# Altium PCB АСТА.758723.035_V3.PcbDoc
Units mm, origin at the board's own origin, x right, y up, seen from the top; angles counter-clockwise.
Board outline 100 x 38 mm, 2 copper layers (Top Layer, Bottom Layer); 18 components, 10 nets, 84 pads, 15 vias.
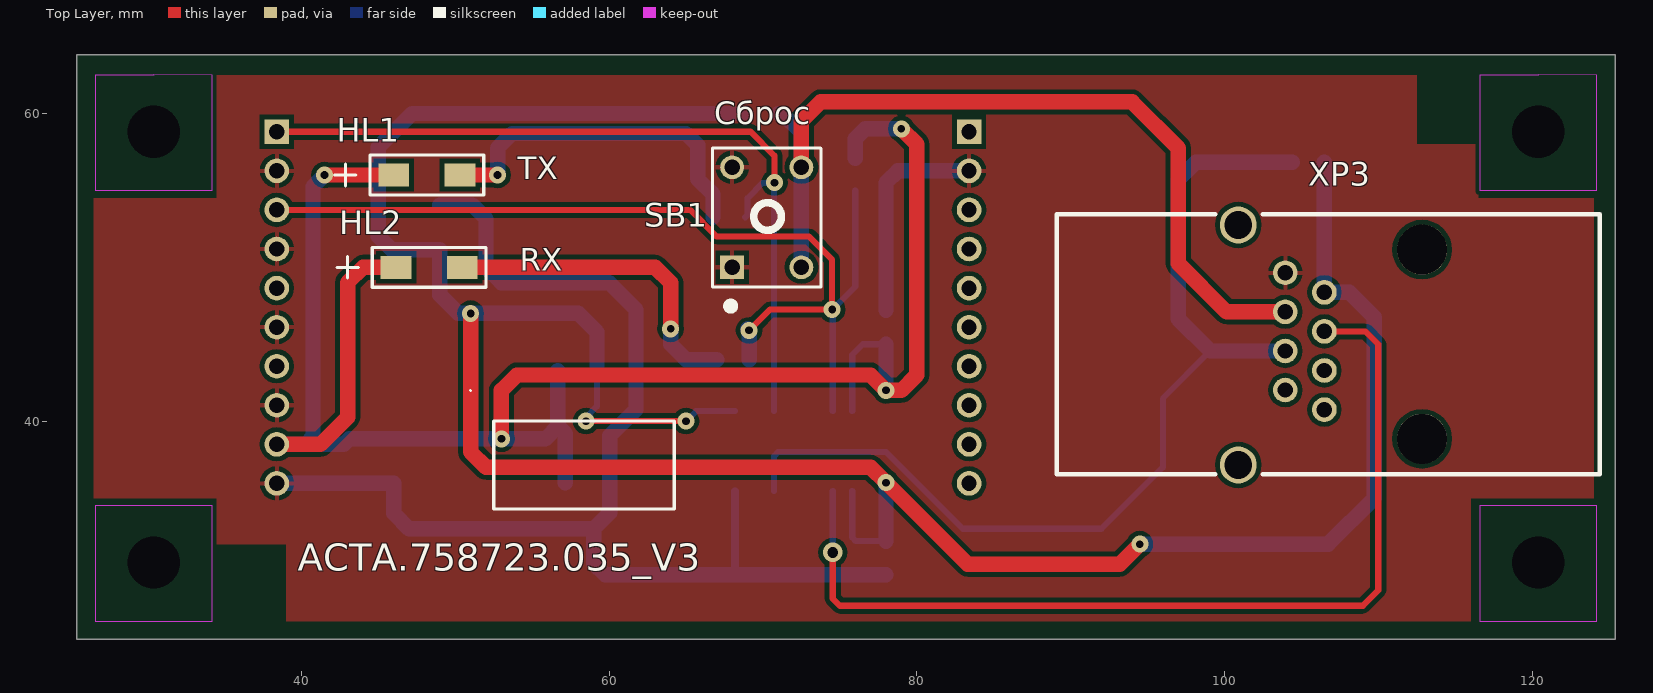
[diagram p0: Top Layer view]
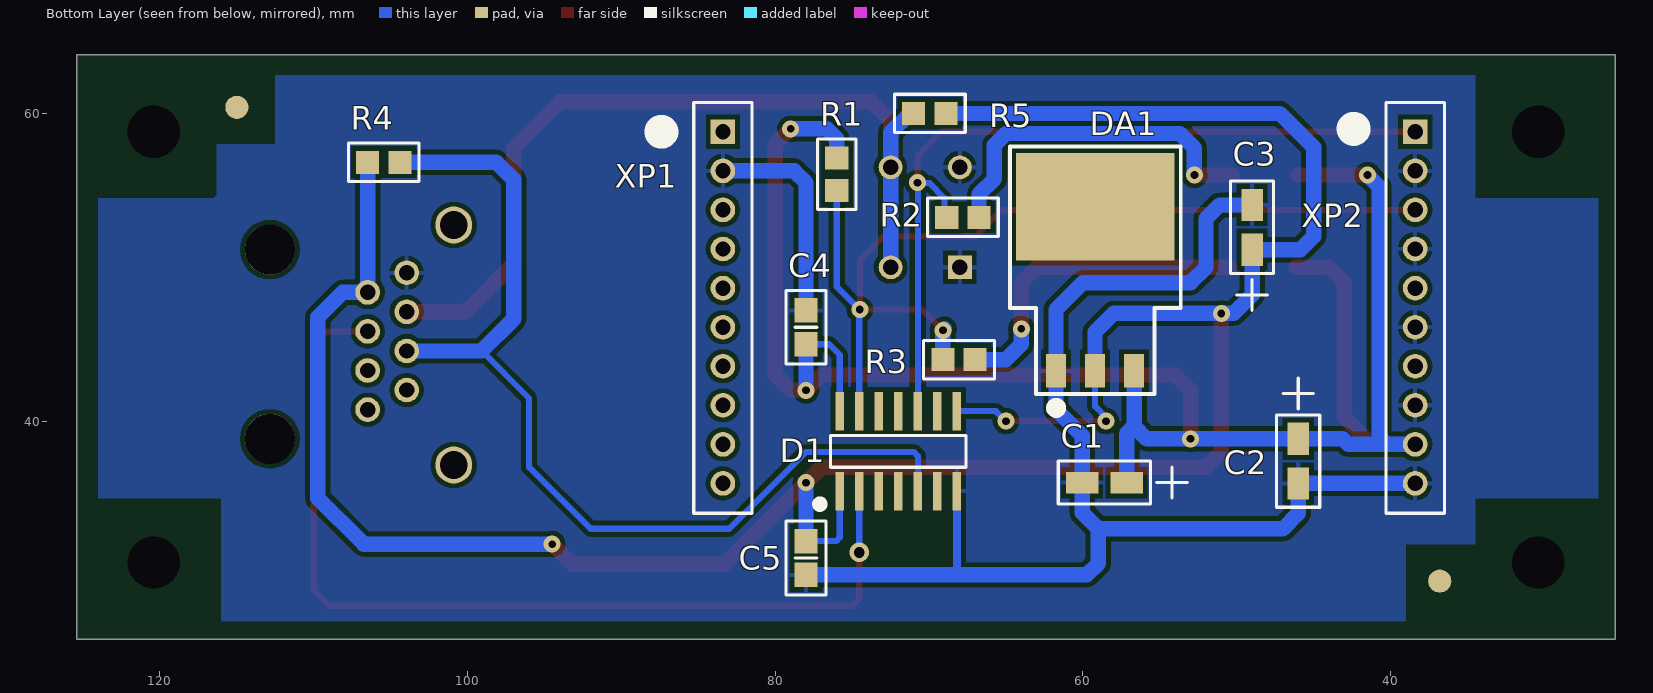
[diagram p1: Bottom Layer view, seen from below]

## Layer stack, top to bottom
Top Solder: solder mask 0.0102, Solder Resist, Dk 3.5
Top Layer: signal copper 0.0356
Dielectric1: dielectric 0.32, FR-4, Dk 4.8
Bottom Layer: signal copper 0.0356
Bottom Solder: solder mask 0.0102, Solder Resist, Dk 3.5

## Board outline
25.4,25.808 125.4,25.808 125.4,63.808 25.4,63.808

## Design rules (kind name [scope] priority, off if disabled: settings)
Clearance [All] p1: gap=0.3
HoleSize [All] p1: absolutevalues=TRUE maxlimit=3.4 minlimit=0.5 maxpercent=80.000 minpercent=20.000
PasteMaskExpansion [All] p1: expansion=0.075
PlaneConnect [All] p1: planeconnectstyle=Relief reliefexpansion=0.6 reliefentries=4 reliefconductorwidth=0.3 reliefairgap=0.3
PolygonConnect [All] p1: connectstyle=Relief reliefconductorwidth=0.3 reliefentries=4 polygonreliefangle="90 Angle" airgapwidth=0.3
RoutingVias [All] p1: holewidth=0.5 width=1.1 viastyle="Through Hole" minholewidth=0.5 minwidth=1.1 maxholewidth=0.5 maxwidth=1.1
SilkToSolderMaskClearance [IsPad] p1: minsilkscreentomaskgap=0.2 clearancetoexposedcopper=TRUE
SolderMaskExpansion [All] p1: expansion=0.102
Width [All] p1: maxlimit=1 minlimit=0.3 preferedwidth=0.3
25 further rules are at their usual default settings.

## Components (designator, comment, footprint, x,y, rotation, side; value= is the part's Value field where it differs from the comment)
C1 "10uF" TANTAL_A 60,36 r0 bottom
C2 "10uF" TANTAL_A 46,36 r270 bottom
C3 "10uF" TANTAL_A 49,54 r90 bottom
C4 "0.1uF" CAP_0805 78,45 r270 bottom
C5 "0.1uF" CAP_0805 78,30 r270 bottom
D1 "TXS0104EDR" SOIC(D)_014 72,38 r90 bottom
DA1 "LM1086ISX-3.3" TO-263 59.14,53.96 r270 bottom
HL1 "AP3216SYC" 1206 50.15,56 r180 top
HL2 "AP3216SGC" 1206 50.3,50 r180 top
R1 "10K" RES_0805 76,57 r90 bottom
R2 "1K" RES_0805 68.75,53.25 r0 bottom
R3 "1K" RES_0805 69,44 r0 bottom
R4 "10K" RES_0805 106.4,56.825 r0 bottom
R5 "10K" RES_0805 69,60 r180 bottom
SB1 "06_43" DIP_SWICH_0643 68,50 r90 top
XP1 "PLS-10" PLS-10 83.4,58.808 r180 bottom
XP2 "PLS-10" PLS-10 38.4,58.808 r180 bottom
XP3 "XP1002000-04R" XP1002000-04R 106.5,40.75 r180 top

## Footprints (in the part's own frame and the unit in brackets; to place one, negate y for a bottom-side part, rotate by r counter-clockwise, add the part's x,y. Pads: shape width x height; smd on the part's side, far side on the other; paste and mask are expansions set on the pad)
1206 [mm]
  rect 2x1.5 smd: 1(-0.15,0) 2(4.15,0)
  silkscreen extent -1.7,-1.3 8,1.3
CAP_0805 [mm] "Chip Resistor, Body 2.0x1.2mm, IPC Low Density"
  rect 1.6x1.5 smd: 1(0,0) 2(-2.2,0)
  silkscreen extent -3.5,-1.3 1.3,1.3
DIP_SWICH_0643 [mm]
  rect 1.55x1.55 hole 1: 1(0,0)
  round 1.55 hole 1: 2(0,-4.5) 3(6.5,0) 4(6.5,-4.5)
  silkscreen extent -2.76,-5.77 7.75,1.28
PLS-10 [mm]
  rect 1.6x1.6 hole 1: 1(0,0)
  round 1.6 hole 1: 2(0,-2.54) 3(0,-5.08) 4(0,-7.62) 5(0,-10.16) 6(0,-12.7) 7(0,-15.24) 8(0,-17.78) 9(0,-20.32) 10(0,-22.86)
  silkscreen extent -4.1,-24.8 1.9,1.9
RES_0805 [mm] "Chip Resistor, Body 2.0x1.2mm, IPC Low Density"
  rect 1.5x1.5 smd: 1(0.1,0) 2(-2,0)
  silkscreen extent -3.25,-1.25 1.35,1.25
SOIC(D)_014 [mm]
  rect 2.5x0.55 smd: 1(-2.55,3.81) 2(-2.55,2.54) 3(-2.55,1.27) 4(-2.55,0) 5(-2.55,-1.27) 6(-2.55,-2.54) 7(-2.55,-3.81) 8(2.65,-3.81) 9(2.65,-2.54) 10(2.65,-1.27) 11(2.65,0) 12(2.65,1.27) 13(2.65,2.54) 14(2.65,3.81)
  silkscreen extent -3.65,-4.4 1.07,5.35
TANTAL_A [mm]
  rect 2.1x1.4 smd: 1(-2.85,0) 2(0.05,0)
  silkscreen extent -6.8,-1.4 1.6,1.4
TO-263 [mm]
  rect 2.16x1.3 smd: 1(10.69,-2.61) 2(10.69,-0.07) 3(10.69,2.47)
  rect 7x10.3 smd: 4(0.02,-0.07)
  silkscreen extent -3.9,-5.6 13.4,5.5
XP1002000-04R [mm]
  round 1.6 hole 1: 1(2.54,-8.89) 2(0,-7.62) 3(2.54,-6.35) 4(0,-5.08) 5(2.54,-3.81) 6(0,-2.54) 7(2.54,-1.27) 8(0,0)
  round 2.4 hole 1.8: 9(5.6,-12) 10(5.6,3.6)
  round 3.25 hole 3.25 unplated: 11(-6.35,1.9) 12(-6.35,-10.4)
  silkscreen extent -17.9,-12.7 17.4,4.2

## Part data
C1 C2 C3: library part TANTAL_A
C4 C5: library part CAP-0805
D1: "Bidirectional Voltage level; 4-bit"
DA1: library part LM1086, "to + 3.3  1.5A"
HL1 HL2: library part AP3216(1206), "Светодиод планарный 1206"
R1 R2 R3 R4 R5: library part RES-0805
XP3: "Serial to Ethernet Port"

## Free pads (board coordinates)
  round 0 hole 3.4 unplated: 1(30.4,30.808) 2(120.4,30.808) 3(120.4,58.808) 4(30.4,58.808)
  round 1.5 smd far side mask+1: 1(36.8,29.6) 2(115,60.4)

## Via types
v1: diameter 1.1, hole 0.5, Top Layer to Bottom Layer, tented both sides, 14 vias
v2: diameter 1.27, hole 0.711, Top Layer to Bottom Layer, 1 vias

## Nets (pads, with @x,y where several pads share a name; then routed paths per layer and width w, separated by ;. In a path a pad name is that pad's centre, name@x,y a point inside that pad or via, vN(x,y) a via of type N, cw(c..) or ccw(c..) an arc to the next point about the centre after c; other vN are vias at no path point)
+3.3V: C3.1 C5.2 D1.1 D1.8 DA1.2 R4.1 R5.1 XP3.2 | length 171
  Top Layer w0.4: v1(58.5,40) v1(65,40)
  Top Layer w1: v1(51,47) 51,38 52,37 77,37 v1(78,36) 83.3,30.7 93.2,30.7 v1(94.5,32)
  Bottom Layer w0.4: v1(58.5,40) 58.5,40.25 59.21,40.96 DA1.2 ; v1(65,40) 65.65,40.65 D1.8 ; D1.1 75.81,32.44 76.05,32.2 C5.2
  Bottom Layer w1: DA1.2 59.21,45.79 58,47 v1(51,47) 50.2,47 49,48.2 C3.1 45.85,51.15 45,52 45,57.808 47.192,60 R5.1 ; C5.2 v1(78,36) ; v1(94.5,32) 106.75,32 109.75,35 109.75,46.75 108.13,48.37 XP3.2 R4.1
+5V: C1.1 C2.1 C4.1 D1.14 DA1.3 HL1.2 HL2.2 R1.1 XP2.9 | length 127.9
  Top Layer w1: XP2.9 41.238,38.488 43,40.25 43,49 44,50 HL2.2 ; v1(41.5,56) HL1.2 ; v1(53,38.85) 53,42 54,43 77,43 v1(78,42) 79,42 80,43 80,58 v1(79,59)
  Bottom Layer w0.4: D1.14 75.81,44.31 76.5,45 C4.1
  Bottom Layer w1: XP2.9 40.25,38.488 ; v1(41.5,56) 40.75,55.25 40.75,38.988 40.25,38.488 ; DA1.3 56.67,39.67 ; C1.1 57.15,39.19 56.67,39.67 ; R1.1 76,58.35 76.65,59 v1(79,59) ; v1(78,42) C4.1 ; 40.25,38.488 42.738,38.488 43.1,38.85 C2.1 v1(53,38.85) 55.85,38.85 56.67,39.67
GND: C1.2 C2.2 C3.2 C4.2 C5.1 D1.7 DA1.1 SB1.1 SB1.3 XP1.2 XP2.2 XP2.4 XP2.6 XP2.8 XP2.10 XP3.1 | length 96.9
  Bottom Layer w0.5: 68,30 68.19,30.19 D1.7
  Bottom Layer w1: XP2.10 38.402,35.95 C2.2 46,34 47,33 59,33 ; C3.2 51.113,54.05 52,53.163 52,50 53,49 60,49 61.75,47.25 DA1.1 61.75,40.75 60.05,39.05 C1.2 60.05,34.05 59,33 ; C5.1 68,30 59.75,30 59,30.75 59,33 ; C4.2 78,55.5 78.768,56.268 XP1.2
NetD1_2: D1.2 XP3.4 | length 62.9
  Top Layer w0.4: v2(74.54,31.46) 74.54,28.46 75,28 109,28 110,29 110,45 109.17,45.83 XP3.4
  Bottom Layer w0.4: v2(74.54,31.46) D1.2
NetD1_5: D1.5 R4.2 XP3.5 | length 65
  Bottom Layer w0.4: D1.5 70.73,37.73 71,38 78,38 83,33 92,33 96,37 96,41.47 99.09,44.56
  Bottom Layer w1: XP3.5 99.09,44.56 97,46.65 97,55.7 98.125,56.825 R4.2
NetD1_10: D1.10 R2.1 XP2.1 | length 53
  Top Layer w0.4: XP2.1 69.192,58.808 70.75,57.25 v1(70.75,55.5)
  Bottom Layer w0.4: R2.1 69,53.4 69,54.5 69.98,55.48 70.73,55.48 D1.10
NetD1_13: D1.13 R1.2 R3.1 XP2.3 | length 63.7
  Top Layer w0.4: XP2.3 65.272,53.728 67,52 73,52 74.5,50.5 v1(74.5,47.25) 70.45,47.25 v1(69.1,45.9)
  Bottom Layer w0.4: D1.13 74.54,47.21 v1(74.5,47.25) 76,48.75 R1.2
  Bottom Layer w1: v1@69,46 v1(69.1,45.9) R3.1
NetHL1_1: HL1.1 R2.2 | length 23
  Top Layer w1: HL1.1 v1(52.75,56)
  Bottom Layer w1: v1(52.75,56) 52.75,57.75 53.7,58.7 65,58.7 65.75,57.95 65.75,55.75 66.75,54.75 R2.2
NetHL2_1: HL2.1 R3.2 | length 21.4
  Top Layer w1: HL2.1 63,50 64,49 v1(64,46)
  Bottom Layer w1: v1(64,46) 64,45 65,44 R3.2
RESET: R5.2 SB1.2 SB1.4 XP3.3 | length 55.8
  Top Layer w1: SB1.4 72.5,59.5 73.75,60.75 94,60.75 97,57.75 97,50.25 100.15,47.1 XP3.3
  Bottom Layer w1: R5.2 71.25,60 72.5,58.75 SB1.4 SB1.2
pads on no net: D1.3 D1.4 D1.6 D1.9 D1.11 D1.12 DA1.4 XP1.1 XP1.3 XP1.4 XP1.5 XP1.6 XP1.7 XP1.8 XP1.9 XP1.10 XP2.5 XP2.7 XP3.6 XP3.7 XP3.8 XP3.9 XP3.10 XP3.11 XP3.12

## Polygon pours and split planes (outlines as drawn)
GND on Top Layer "Top Layer, Top-GND" (solid, remove dead copper, pour order 4): 34.5,62.5 112.5,62.5 112.5,58 116.5,58 116.5,54.5 124,54.5 124,35 116,35 116,27 39,27 39,32 34.5,32 34.5,35 26.5,35 26.5,54.5 34.5,54.5 34.5,62.5
GND on Bottom Layer "Bot Layer, Bot-GND" (solid, remove dead copper, pour order 6): 34.506,62.5 112.5,62.5 112.5,58 116.294,58 116.294,54.706 116.5,54.5 124,54.5 124,35 116,35 116,27 39,27 39,32 34.506,32 34.506,34.994 34.5,35 26.5,35 26.5,54.5 34.5,54.5 34.5,62.494 34.506,62.5

## Keep-outs
Top Layer:
  region: 120.4,34.508 120.392,34.5 116.6,34.5 116.6,27 124.2,27 124.2,34.5
  region: 120.4,62.508 120.392,62.5 116.6,62.5 116.6,55 124.2,55 124.2,62.5
  region: 30.4,62.508 30.392,62.5 26.6,62.5 26.6,55 34.2,55 34.2,62.5
  region: 30.4,34.508 30.392,34.5 26.6,34.5 26.6,27 34.2,27 34.2,34.5

## Silkscreen, mask and mechanical layers (free items; w line width, h text height)
Top Overlay:
  lines w0.2: 51,42 51,42 ; 52.5,34.3 64.233,34.3 64.233,40 52.5,40 52.5,34.3
  text "Сброс" at 66.85,58.8 h2.5
  text "TX" at 54.05,55.25 h2.5
  text "RX" at 54.2,49.3 h2.5
  text "АСТА.758723.035_V3" at 39.75,29.7 h3
Board:
  the board outline again, w0.2
  text "\H3.5;\W0.965;\Q15;\Q15;\H5.00;5" at 8.507,59.009 h0
Drill Drawing:
  circle w0.025: c128.815,47.528 r0.635
  lines w0.025: 128.18,31.653 129.45,31.653 129.45,32.923 128.18,32.923 128.18,31.653 ; 128.18,35.78 128.498,35.78 128.498,35.463 129.133,35.463 129.133,35.78 129.45,35.78 129.45,36.415 129.133,36.415 129.133,36.733 128.498,36.733 128.498,36.415 128.18,36.415 128.18,35.78 ; 128.18,39.273 128.815,39.59 129.45,39.273 129.133,39.908 129.45,40.543 128.815,40.225 128.18,40.543 128.498,39.908 128.18,39.273 ; 128.18,44.353 129.45,44.353 128.815,43.083 128.18,44.353 ; 128.18,51.02 128.498,51.02 128.815,50.703 129.133,51.02 129.45,51.02 129.133,51.338 129.45,51.655 129.133,51.655 128.815,51.973 128.498,51.655 128.18,51.655 128.498,51.338 128.18,51.02
  lines w0.381: 126.45,30.51 224.976,30.51 ; 126.45,53.37 224.976,53.37 ; 140.442,26.7 140.442,57.18 ; 158.167,26.7 158.167,57.18 ; 192.345,26.7 192.345,57.18 ; 205.194,26.7 205.194,57.18 ; 126.45,26.7 224.976,26.7 224.976,57.18 126.45,57.18 126.45,26.7
  text "Symbol" at 128.736,54.513 h1.83
  text "Hit Count" at 141.585,54.513 h1.83
  text "Finished Hole Size" at 159.31,54.513 h1.83
  text "Plated" at 193.488,54.513 h1.83
  text "Hole Type" at 206.337,54.513 h1.83
  text "1" at 141.585,50.703 h1.52
  text "0,711mm" at 159.31,50.703 h1.52
  text "PTH" at 193.488,50.703 h1.52
  text "Round" at 206.337,50.703 h1.52
  text "2" at 141.585,46.893 h1.52
  text "1,800mm" at 159.31,46.893 h1.52
  text "PTH" at 193.488,46.893 h1.52
  text "Round" at 206.337,46.893 h1.52
  text "2" at 141.585,43.083 h1.52
  text "3,250mm" at 159.31,43.083 h1.52
  text "NPTH" at 193.488,43.083 h1.52
  text "Round" at 206.337,43.083 h1.52
  text "4" at 141.585,39.273 h1.52
  text "3,400mm" at 159.31,39.273 h1.52
  text "NPTH" at 193.488,39.273 h1.52
  text "Round" at 206.337,39.273 h1.52
  text "14" at 141.585,35.463 h1.52
  text "0,500mm" at 159.31,35.463 h1.52
  text "PTH" at 193.488,35.463 h1.52
  text "Round" at 206.337,35.463 h1.52
  text "32" at 141.585,31.653 h1.52
  text "1,000mm" at 159.31,31.653 h1.52
  text "PTH" at 193.488,31.653 h1.52
  text "Round" at 206.337,31.653 h1.52
  text "55 Total" at 141.585,27.843 h1.52
Graf. SAPR:
  circle w0.2: c30.4,30.808 r1.7
  circle w0.2: c38.4,35.948 r0.9
  circle w0.2: c38.4,38.488 r0.9
  circle w0.2: c38.4,41.028 r0.9
  circle w0.2: c38.4,43.568 r0.9
  circle w0.2: c38.4,46.108 r0.9
  circle w0.2: c38.4,48.648 r0.9
  circle w0.2: c38.4,51.188 r0.9
  circle w0.2: c38.4,53.728 r0.9
  circle w0.2: c38.4,56.268 r0.9
  circle w0.2: c38.4,58.808 r0.9
  circle w0.2: c30.4,58.808 r1.7
  circle w0.2: c83.4,58.808 r0.9
  circle w0.2: c83.4,56.268 r0.9
  circle w0.2: c83.4,53.728 r0.9
  circle w0.2: c83.4,51.188 r0.9
  circle w0.2: c83.4,48.648 r0.9
  circle w0.2: c83.4,46.108 r0.9
  circle w0.2: c83.4,43.568 r0.9
  circle w0.2: c83.4,41.028 r0.9
  circle w0.2: c83.4,38.488 r0.9
  circle w0.2: c83.4,35.948 r0.9
  circle w0.2: c120.4,58.808 r1.7
  circle w0.2: c120.4,30.808 r1.7
  lines w0.2: 26.7,30.808 30.4,30.808 ; 26.7,58.808 30.4,58.808 ; 30.4,27.108 30.4,30.808 ; 30.4,34.508 30.4,30.808 ; 30.4,55.108 30.4,58.808 ; 30.4,62.508 30.4,58.808 ; 34.1,30.808 30.4,30.808 ; 34.1,58.808 30.4,58.808 ; 35.5,35.948 38.4,35.948 ; 35.5,38.488 38.4,38.488 ; 35.5,41.028 38.4,41.028 ; 35.5,43.568 38.4,43.568 ; 35.5,46.108 38.4,46.108 ; 35.5,48.648 38.4,48.648 ; 35.5,51.188 38.4,51.188 ; 35.5,53.728 38.4,53.728 ; 35.5,56.268 38.4,56.268 ; 35.5,58.808 38.4,58.808 ; 38.4,33.048 38.4,35.948 ; 38.4,35.588 38.4,38.488 ; 38.4,38.128 38.4,41.028 ; 38.4,38.848 38.4,35.948 ; 38.4,40.668 38.4,43.568 ; 38.4,41.388 38.4,38.488 ; 38.4,43.208 38.4,46.108 ; 38.4,43.928 38.4,41.028 ; 38.4,45.748 38.4,48.648 ; 38.4,46.468 38.4,43.568 ; 38.4,48.288 38.4,51.188 ; 38.4,49.008 38.4,46.108 ; 38.4,50.828 38.4,53.728 ; 38.4,51.548 38.4,48.648 ; 38.4,53.368 38.4,56.268 ; 38.4,54.088 38.4,51.188 ; 38.4,55.908 38.4,58.808 ; 38.4,56.628 38.4,53.728 ; 38.4,59.168 38.4,56.268 ; 38.4,61.708 38.4,58.808 ; 41.3,35.948 38.4,35.948 ; 41.3,38.488 38.4,38.488 ; 41.3,41.028 38.4,41.028 ; 41.3,43.568 38.4,43.568 ; 41.3,46.108 38.4,46.108 ; 41.3,48.648 38.4,48.648 ; 41.3,51.188 38.4,51.188 ; 41.3,53.728 38.4,53.728 ; 41.3,56.268 38.4,56.268 ; 41.3,58.808 38.4,58.808 ; 80.5,35.948 83.4,35.948 ; 80.5,38.488 83.4,38.488 ; 80.5,41.028 83.4,41.028 ; 80.5,43.568 83.4,43.568 ; 80.5,46.108 83.4,46.108 ; 80.5,48.648 83.4,48.648 ; 80.5,51.188 83.4,51.188 ; 80.5,53.728 83.4,53.728 ; 80.5,56.268 83.4,56.268 ; 80.5,58.808 83.4,58.808 ; 83.4,33.048 83.4,35.948 ; 83.4,35.588 83.4,38.488 ; 83.4,38.128 83.4,41.028 ; 83.4,38.848 83.4,35.948 ; 83.4,40.668 83.4,43.568 ; 83.4,41.388 83.4,38.488 ; 83.4,43.208 83.4,46.108 ; 83.4,43.928 83.4,41.028 ; 83.4,45.748 83.4,48.648 ; 83.4,46.468 83.4,43.568 ; 83.4,48.288 83.4,51.188 ; 83.4,49.008 83.4,46.108 ; 83.4,50.828 83.4,53.728 ; 83.4,51.548 83.4,48.648 ; 83.4,53.368 83.4,56.268 ; 83.4,54.088 83.4,51.188 ; 83.4,55.908 83.4,58.808 ; 83.4,56.628 83.4,53.728 ; 83.4,59.168 83.4,56.268 ; 83.4,61.708 83.4,58.808 ; 86.3,35.948 83.4,35.948 ; 86.3,38.488 83.4,38.488 ; 86.3,41.028 83.4,41.028 ; 86.3,43.568 83.4,43.568 ; 86.3,46.108 83.4,46.108 ; 86.3,48.648 83.4,48.648 ; 86.3,51.188 83.4,51.188 ; 86.3,53.728 83.4,53.728 ; 86.3,56.268 83.4,56.268 ; 86.3,58.808 83.4,58.808 ; 116.7,30.808 120.4,30.808 ; 116.7,58.808 120.4,58.808 ; 120.4,27.108 120.4,30.808 ; 120.4,34.508 120.4,30.808 ; 120.4,55.108 120.4,58.808 ; 120.4,62.508 120.4,58.808 ; 124.1,30.808 120.4,30.808 ; 124.1,58.808 120.4,58.808 ; 38.4,35.948 38.4,38.488 ; 38.4,38.488 38.4,41.028 ; 38.4,41.028 38.4,43.568 ; 38.4,43.568 38.4,46.108 ; 38.4,46.108 38.4,48.648 ; 38.4,48.648 38.4,51.188 ; 38.4,51.188 38.4,53.728 ; 38.4,53.728 38.4,56.268 ; 38.4,56.268 38.4,58.808

## Dimensions
25.4,25.808 to 25.4,63.808 on Dim
25.4,63.808 to 125.4,63.808 on Dim